# Altium PCB main.PcbDoc (part 2 of 3)
Units mm, origin at the board's own origin, x right, y up, seen from the top; angles counter-clockwise.
Board outline 60 x 99 mm, 4 copper layers (Top Layer, Ground Layer, Power Layer, Bottom Layer), stack 1.591 mm thick; 202 components, 164 nets, 893 pads, 275 vias.
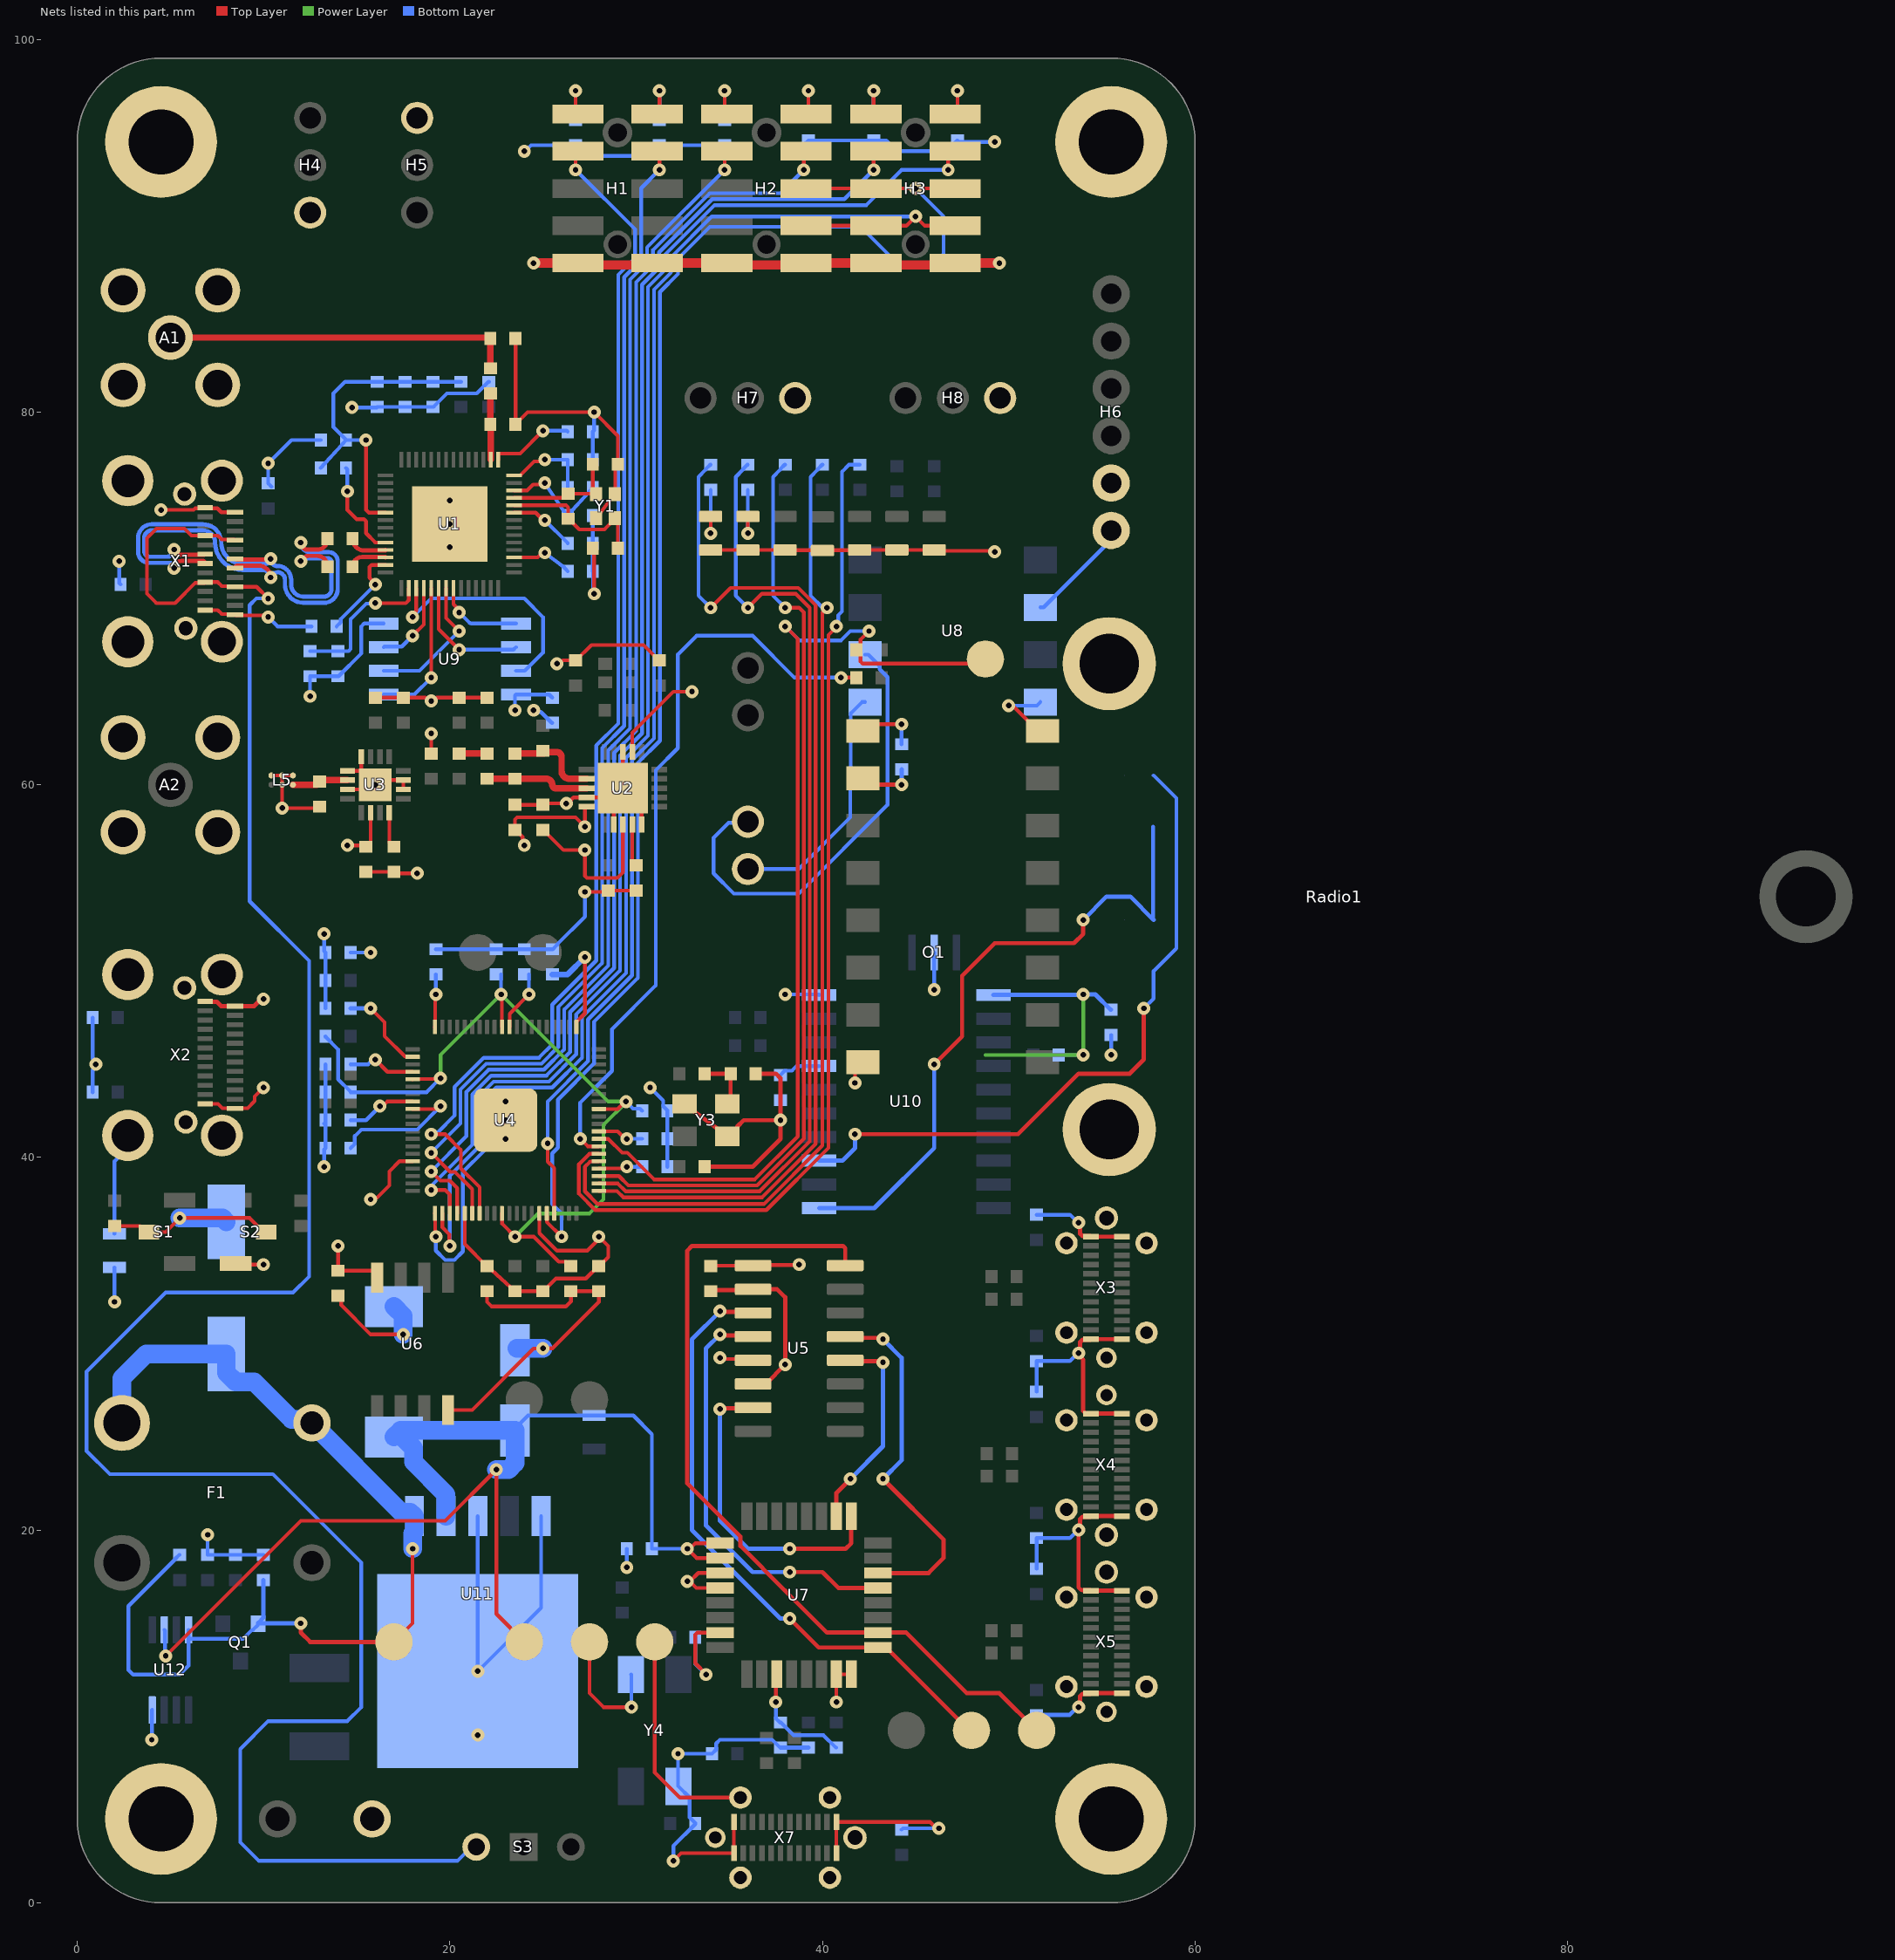
[diagram p4: the nets of this part, all layers, seen from the top]

## Part data
A1 A2: library part "[SMA] 90deg Jack", "SMA-J-P-H-RA-TH1", Supplier Part Number 1=SAM8856-ND, Supplier 1=DigiKey
C1 C2: library part "[Cap] SMD Nonpolarized", Capacitance=1.2pF, Size Package=0603, Supplier Part Number 1=4713-CHV0603N2501R2BCT-ND, Tolerance=1%, Voltage=6.3V, Supplier 1=DigiKey
C3 C4: library part "[Cap] SMD Nonpolarized", Capacitance=6pF, Size Package=0603, Supplier Part Number 1=311-1055-1-ND, Tolerance=1%, Voltage=6.3V, Supplier 1=DigiKey
C5 C6: library part "[Cap] SMD Nonpolarized", Capacitance=14pF, Size Package=0603, Supplier Part Number 1=311-3887-1-ND, Tolerance=1%, Voltage=6.3V, Supplier 1=DigiKey
C7: library part "[Cap] SMD Nonpolarized", Capacitance=4.7pF, Size Package=0603, Supplier Part Number 1=13-CC0603CPNPO9BN4R7CT-ND, Tolerance=5%, Voltage=6.3V, Supplier 1=DigiKey
C8: library part "[Cap] SMD Nonpolarized", Capacitance=2.2nF, Size Package=0603, Supplier Part Number 1=490-1459-1-ND, Tolerance=5%, Voltage=6.3V, Supplier 1=DigiKey
C9: library part "[Cap] SMD Nonpolarized", Capacitance=1.0pF, Size Package=0603, Supplier Part Number 1=311-1049-1-ND, Tolerance=5%, Voltage=6.3V, Supplier 1=DigiKey
C10: library part "[Cap] SMD Nonpolarized", Capacitance=1.5pF, Size Package=0603, Supplier Part Number 1=311-1737-1-ND, Tolerance=5%, Voltage=6.3V, Supplier 1=DigiKey
C11: library part "[Cap] SMD Nonpolarized", Capacitance=0.3pF, Size Package=0603, Supplier Part Number 1=712-QSCP251Q0R3A1GV001TCT-ND, Tolerance=5%, Voltage=6.3V, Supplier 1=DigiKey
C12: library part "[Cap] SMD Nonpolarized", Capacitance=1nF, Size Package=0603, Supplier Part Number 1=490-1451-6-ND, Tolerance=5%, Voltage=6.3V, Supplier 1=DigiKey
C13: library part "[Cap] SMD Nonpolarized", Capacitance=10nF, Size Package=0603, Supplier Part Number 1=399-C0603C103J5RACTUDKR-ND, Tolerance=5%, Voltage=6.3V, Supplier 1=DigiKey
C14: library part "[Cap] SMD Nonpolarized", Capacitance=1uF, Size Package=0603, Supplier Part Number 1=311-3485-1-ND, Tolerance=5%, Voltage=6.3V, Supplier 1=DigiKey
C15: library part "[Cap] SMD Nonpolarized", Capacitance=220pF, Size Package=0603, Supplier Part Number 1=399-C0603C221J5GAC7411CT-ND, Tolerance=5%, Voltage=6.3V, Supplier 1=DigiKey
C16: library part "[Cap] SMD Nonpolarized", Capacitance=33nF, Size Package=0603, Supplier Part Number 1=311-4015-1-ND, Tolerance=5%, Voltage=6.3V, Supplier 1=DigiKey
C17 C18: Capacitance=15pF, Size Package=0603, Supplier Part Number 1=490-16416-1-ND, Tolerance=1%, Voltage=6.3V, Supplier 1=DigiKey
C19 C20 C21 C22 C23 C24 C25 C26 C27 C28 C29 C35 C39 C40 C42 C43 C44 C45 C46 C48 C51 C52 C53 C55 C56 C57 C58 C59 C62 C63 C64 C66 C67: Capacitance=100nF, Size Package=0603, Supplier Part Number 1=311-1088-6-ND, Tolerance=5%, Voltage=6.3V, Supplier 1=DigiKey
C30 C31: library part "[Cap] SMD Nonpolarized", Capacitance=1.8pF, Size Package=0603, Supplier Part Number 1=478-600S1R8BT250XT4KCT-ND, Tolerance=10%, Voltage=6.3V, Supplier 1=DigiKey
C32 C34 C36 C38 C41: library part "[Cap] SMD Nonpolarized", Capacitance=1uF, Size Package=0603, Supplier Part Number 1=1276-6524-1-ND, Tolerance=10%, Voltage=6.3V, Supplier 1=DigiKey
C33: library part "[Cap] SMD Nonpolarized", Capacitance=10uF, Size Package=0603, Supplier Part Number 1=587-3258-1-ND, Tolerance=10%, Voltage=6.3V, Supplier 1=DigiKey
C37: library part "[Cap] SMD Nonpolarized", Capacitance=100pF, Size Package=0603, Supplier Part Number 1=490-1427-1-ND, Tolerance=10%, Voltage=6.3V, Supplier 1=DigiKey
C47 C49 C50 C54: Capacitance=4.7uF, Size Package=0603, Supplier Part Number 1=490-7203-1-ND, Tolerance=10%, Voltage=6.3V, Supplier 1=DigiKey
C60: library part "[Cap] SMD Polarized", Capacitance=680uF, Max Voltage=6.3V, Supplier Part Number 1=PCE3781CT-ND, Tolerance=20%, Diameter=8mm, Supplier 1=DigiKey
C61: library part "[Cap] SMD Polarized", Capacitance=220uF, Max Voltage=6.3V, Supplier Part Number 1=493-17593-1-ND, Tolerance=20%, Diameter=5mm, Supplier 1=DigiKey
C65 C68: library part "[Cap] SMD Nonpolarized", Capacitance=24pF, Size Package=0603, Supplier Part Number 1=490-GCM1885C2A240JA16DCT-ND, Tolerance=1%, Voltage=6.3V, Supplier 1=DigiKey
D1: library part "[LED] SMD", "Generic", Color=Green, Size Package=0805, Supplier Part Number 1=475-LGR971-KN-1CT-ND, Supplier 1=DigiKey
D2: library part "[LED] SMD", "Generic", Color=Yellow, Size Package=0805, Supplier Part Number 1=475-LYR976-PS-36-0-20-R18CT-ND, Supplier 1=DigiKey
D3: library part "[LED] SMD", "Generic", Color=Red, Size Package=0805, Supplier Part Number 1=475-LSR976-NR-1CT-ND, Supplier 1=DigiKey
D4 D7: library part "[LED] SMD", "Generic", Color=Blue, Size Package=0805, Supplier Part Number 1=732-4982-1-ND, Supplier 1=DigiKey
D5 D6: library part "[LED] SMD", "Generic", Color=Yellow, Size Package=0805, Supplier Part Number 1=3147-B1701UY--20D000214U1930CT-ND, Supplier 1=DigiKey
D8: library part "[Diode] SMD Schottky", "Generic", Size Package=DO-214AB, Supplier Part Number 1=B530C-FDICT-ND, Supplier 1=DigiKey
F1: library part "[Fuse] Blade Right-Angle", Supplier Part Number 1=36-3549-2-ND, Amperage=10A, Supplier 1=DigiKey
F2: "MF-MSMF050-2", Size Package=1812, Supplier Part Number 1=MF-MSMF050-2DKR-ND, Trip Current=500mA, Supplier 1=DigiKey
H1 H2 H3: Supplier Part Number 1=WM4227-ND, Supplier 1=DigiKey
H4 H5 H7 H8: library part "[Header] Shrouded 1x3 Male", "070543-0037 / Mates with 005057-9403", Supplier Part Number 1=WM4825-ND, Supplier 1=DigiKey
  H7 H8: Supplier 2=DigiKey, Supplier Part Number 2=WM2901-ND
H6: "0705430005 / Mates with 0050579406", Supplier Part Number 1=WM4804-ND, Supplier 1=DigiKey, Supplier 2=DigiKey, Supplier Part Number 2=WM2904-ND
H9 H10: library part "[Header] Shrouded 1x2 Male", "0705430036 / Mates with 0050579402", Supplier Part Number 1=WM4824-ND, Supplier 1=DigiKey, Supplier 2=DigiKey, Supplier Part Number 2=WM2900-ND
J1 J2 J3 J4: "Solderable jumper"
  J1 J3: NO/NC=NO
  J2 J4: NO/NC=NC
L1: library part "[Inductor] SMD Inductor", Inductance=2.7nH, Size Package=0603, Supplier Part Number 1=732-7447860027GCT-ND, Supplier 1=DigiKey
L2: library part "[Inductor] SMD Inductor", Inductance=2.7nH, Size Package=0603, Supplier Part Number 1=490-1103-1-ND, Supplier 1=DigiKey
L3: library part "[Inductor] SMD Inductor", Inductance=3.9nH, Size Package=0603, Supplier Part Number 1=490-1105-1-ND, Supplier 1=DigiKey
L4: library part "[Inductor] SMD Inductor", Inductance=8.2nH, Size Package=0603, Supplier Part Number 1=490-1109-1-ND, Supplier 1=DigiKey
L5: library part "[Inductor] 2.4GHz Low-Pass RF Filter", "MLPF-NRG-01D3", Supplier Part Number 1=497-MLPF-NRG-01D3CT-ND, Supplier 1=DigiKey
L6: library part "[Inductor] SMD Inductor", Inductance=2.0nH, Size Package=0603, Supplier Part Number 1=490-LQW18AS2N0J00DCT-ND, Supplier 1=DigiKey
L7: library part "[Inductor] SMD Inductor", Inductance=10uH, Size Package=0603, Supplier Part Number 1=445-6755-1-ND, Supplier 1=DigiKey
L8: library part "[Ferrite] SMD Ferrite Bead (2)", Supplier Part Number 1=732-1620-1-ND, Supplier 1=DigiKey
L9: library part "[Inductor] SMD Inductor", Inductance=33uH, Size Package=0805, Supplier Part Number 1=445-6399-1-ND, Supplier 1=DigiKey
Mount1 Mount2 Mount3 Mount4: library part "[Mount] M3 Mount Hole", "Place at least 4.5mm from board edge. Plated."
O1: Supplier Part Number 1=490-17947-1-ND, Supplier 1=DigiKey
Q1: library part "[FET] P-Channel MOSFET", Size Package=TO236AB, Supplier Part Number 1=1727-PMV48XPA2RCT-ND, Supplier 1=DigiKey
R1 R8 R49: "Generic", Resistance=1Meg, Size Package=0603, Supplier Part Number 1=311-1.00MHRDKR-ND, Tolerance=1%, Supplier 1=DigiKey
R2 R3 R10 R12 R17 R18 R19 R20 R21 R22 R23 R24 R37 R39: "Generic", Resistance=27, Size Package=0603, Supplier Part Number 1=749-1631-1-ND, Tolerance=1%, Supplier 1=DigiKey
R4 R5 R11 R13 R14 R25 R26 R27 R28 R29 R30 R31: "Generic", Resistance=1k, Size Package=0603, Supplier Part Number 1=RMCF0603FT1K00DKR-ND, Tolerance=5%, Supplier 1=DigiKey
R6 R7 R40 R46 R47: "Generic", Resistance=10k, Size Package=0603, Supplier Part Number 1=311-10.0KHRDKR-ND, Tolerance=5%, Supplier 1=DigiKey
R9: "Generic", Resistance=22k, Size Package=0603, Supplier Part Number 1=311-22.0HRDKR-ND, Tolerance=1%, Supplier 1=DigiKey
R15 R16: "Generic", Resistance=2k, Size Package=0603, Supplier Part Number 1=P2.0KBDCT-ND, Tolerance=5%, Supplier 1=DigiKey
R32 R34: "Generic", Resistance=10k, Size Package=0603, Supplier Part Number 1=311-10.0KHRCT-ND, Tolerance=5%, Supplier 1=DigiKey
R33 R35 R38 R41 R42 R43 R44 R45 R48 R50 R52 R53: "Generic", Resistance=56k, Size Package=0603, Supplier Part Number 1=A129709CT-ND, Tolerance=1%, Supplier 1=DigiKey
R36: "Generic", Resistance=33, Size Package=0603, Supplier Part Number 1=RR08Q33DCT-ND, Tolerance=1%, Supplier 1=DigiKey
R51: "Generic", Resistance=47k, Size Package=0603, Supplier Part Number 1=311-4.70KHRDKR-ND, Tolerance=5%, Supplier 1=DigiKey
Radio1: library part "[Device] RFDX900 Radio", "RFDX900 Long-Range RF Module", Supplier Part Number 1=609-71609-308LF-ND, Supplier 1=DigiKey
S1 S2: Supplier Part Number 1=SW1021CT-ND, Supplier 1=DigiKey
S3: library part "[Switch] SPDT Switch", Supplier Part Number 1=1948-1087-ND, Supplier 1=DigiKey
TP1 TP2 TP3 TP4 TP5 TP6 TP7 TP8 TP9 TP10 TP11 TP12 TP13: library part "[Probe] Touch Pad"
U1: library part "[MCU] ESP32-S2", Supplier Part Number 1=1965-ESP32-S2FN4R2CT-ND, Supplier 1=DigiKey
U2: library part "[IC] NRF Transceiver", "NRF24L01P-R", Supplier Part Number 1=4823-NRF24L01P-RCT-ND, Supplier 1=DigiKey
U3: library part "[IC] RF Front-End", Supplier Part Number 1=863-1828-1-ND, Supplier 1=DigiKey
U4: library part "[MCU] RP2350B", "QFN-80 Package", Supplier Part Number 1=2648-SC1510-A4CT-ND, Supplier 1=DigiKey
U5: Supplier Part Number 1=296-26909-1-ND, Supplier 1=DigiKey
U6 U9: library part "[Mem] 16Mb Flash Memory", "W25Q128JVSIQ TR", Supplier Part Number 1=256-W25Q128JVSIQTRCT-ND, Supplier 1=DigiKey
U7: library part "[IC] USB Hub 4port (2)", "TUSB2046BVFR", Supplier Part Number 1=296-27131-1-ND, Supplier 1=DigiKey
U8: Supplier Part Number 1=160-2040-1-ND, Supplier 1=DigiKey
U10: library part "[IC] USB-UART Bridge", "MCP2200T-I/SO", Supplier Part Number 1=MCP2200T-I/SOCT-ND, Supplier 1=DigiKey
U11: library part "[Reg] 3V3 Regulator (4)", "3A", Supplier Part Number 1=LM2596SX-3.3/NOPBCT-ND, Supplier 1=DigiKey
U12: library part "[IC] Dual Op-Amp", "LMV358IDGKR", Supplier Part Number 1=296-13455-1-ND, Supplier 1=DigiKey
X1 X2: library part "[Port] USB Type-C", Supplier Part Number 1=670-3104-1-ND, Supplier 1=DigiKey
X3 X4 X5 X7: library part "[Port] USB Type-C Vertical", Supplier Part Number 1=277-1332646CT-ND, Supplier 1=DigiKey
X6: library part "[Screw Terminal] 2pin", Supplier Part Number 1=102-6145-ND, Supplier 1=DigiKey
Y1: library part "[XTAL] SMD 40MHz", "CX2016DB40000D0FLJCC", Supplier Part Number 1=478-CX2016DB40000D0FLJCCDKR-ND, Supplier 1=DigiKey
Y2: library part "[XTAL] SMD 16MHz (2)", "ABM11-16.000MHZ-12-N1G-T", Supplier Part Number 1=535-14950-1-ND, Supplier 1=DigiKey
Y3: library part "[XTAL] SMD 12MHz", "815-ABM8-272-T3", Supplier Part Number 1=535-ABM8-272-T3CT-ND, Supplier 1=DigiKey
Y4: "ECS-060-18-20BM-JEN-TR", Supplier Part Number 1=XC2349CT-ND, Supplier 1=DigiKey

## Via types
v1: diameter 0.7, hole 0.3, Top Layer to Bottom Layer, 275 vias

## Nets (pads, with @x,y where several pads share a name; then routed paths per layer and width w, separated by ;. In a path a pad name is that pad's centre, name@x,y a point inside that pad or via, vN(x,y) a via of type N, cw(c..) or ccw(c..) an arc to the next point about the centre after c; other vN are vias at no path point)
+1V1: C20.2 C47.2 C54.2 C55.2 L7.1 U4.10 U4.32 U4.51 U4.65 | length 47.3
  Top Layer w0.2: U4.65@18,44.2 18.01,44.21 19.46,44.21 v1(19.5,44.25) ; v1(22.75,48.75) 22.79,48.71 22.79,47.01 U4.51@22.8,47 ; U4.10@22.8,37 22.81,36.99 22.81,36.44 v1(23.5,35.75) 24.5,35.75 25.85,34.4 26.275,34.4 C20.2@26.5,34.175 ; U4.32@28,42.6 29.009,42.6 29.409,43 v1@29.5,43
  Power Layer w0.2: v1(19.5,44.25) 19.5,45.5 v1(22.75,48.75) 28.5,43 29.5,43 28.25,41.75 28.25,37.75 27.495,36.995 24.745,36.995 v1(23.5,35.75)
  Bottom Layer w0.2: L7.1@13.325,46.5 13.325,46.475 14,45.8 14,44.2 14.675,43.525 C54.2@14.675,43.5 18.75,43.5 v1(19.5,44.25) ; v1(22.75,48.75) C47.2@22.75,49.825 ; v1(29.455,43) 29.831,42.623 30.202,42.623 C55.2@30.325,42.5
+3V3: C12.2 C13.2 C14.2 C19.2 C21.2 C23.1 C24.2 C25.2 C26.2 C27.2 C28.2 C29.2 C31.2 C32.2 C33.2 C34.2 C35.2 C37.2 C38.2 C39.2 C40.2 C41.2 C42.2 C43.2 C45.2 C46.2 C48.2 C49.1 C50.2 C52.2 C56.2 C57.2 C58.2 C59.2 C61.1 C62.2 C66.2 D8.1 H1.1 H1.2 H2.1 H2.2 H3.1 H3.2 L6.1 L9.2 R15.2 R16.2 R32.1 R34.1 R36.2 R51.1 TP8.1 U1.1 U1.20 U1.27 U1.30 U1.45 U1.51 U1.54 U2.7 U2.15 U2.18 U3.14 U4.5 U4.15 U4.24 U4.29 U4.41 U4.50 U4.60 U4.64 U4.68 U4.69 U4.76 U6.8 U7.3 U7.25 U7.26 U9.8 U11.2 U12.6 | length 226.5
  Top Layer w0.2: v1(4.75,13.25) 12,20.5 19.75,20.5 v1(22.5,23.25) 22.5,15.5 TP8.1@24,14 ; v1(14,35.25) C23.1@14,33.925 15.87,33.925 16.095,33.7 U6.8@16.095,33.55 ; v1(14.5,56.75) 15.425,56.75 C14.2@15.5,56.675 ; v1(15.5,78.5) 15.5,74.75 15.65,74.6 U1.20@16.55,74.6 ; C14.2@15.525,56.675 15.75,56.9 U3.14@15.75,58.5 ; v1(15.75,37.75) 15.846,37.846 16.096,37.846 16.75,38.5 16.75,39.25 17.3,39.8 U4.76@18,39.8 ; v1(16,45.25) 16.65,44.6 U4.64@18,44.6 ; v1(16,69.75) 17.639,69.75 17.8,69.911 U1.30@17.8,70.55 ; v1(16,70.75) 16,70.805 15.694,71.111 15.694,71.689 15.805,71.8 U1.27@16.55,71.8 ; v1(16.25,42.75) 16.385,42.75 16.635,43 U4.68@18,43 ; U4.69@18,42.6 19.215,42.6 19.365,42.75 v1(19.5,42.75) ; U4.60@19.2,47 19.21,47.01 19.21,48.71 v1(19.25,48.75) ; U4.5@20.8,37 20.8,35.35 21.975,34.175 C19.2@22,34.175 22.25,33.95 23.25,33.05 R15.2@23.5,32.825 R16.2@25,32.825 25.025,32.825 25.7,33.5 27.3,33.5 27.975,34.175 C21.2@28,34.175 ; U1.1@22.6,77.45 22.6,77.775 23.775,77.775 v1(25,79) ; U4.50@23.2,47 23.21,47.01 23.21,47.71 v1(24.25,48.75) ; U1.45@23.45,72.2 24.715,72.2 24.965,72.45 v1(25.1,72.45) ; U1.51@23.45,74.6 24.609,74.6 25.009,74.2 v1(25.1,74.2) ; U1.54@23.45,75.8 24.155,75.8 24.47,76.115 25.015,76.115 v1(25.1,76.2) ; v1(24,56.75) 23.904,56.846 23.904,57.196 23.525,57.575 C12.2@23.5,57.575 23.5,58.139 23.611,58.25 26.75,58.25 v1(27.25,57.75) 27.25,58.768 27.3,58.818 U2.15@27.345,58.818 ; U4.15@24.8,37 24.81,36.99 24.81,35.94 25.75,35 27.385,35 28,35.615 v1(28,35.75) 28.5,35.25 28.5,34.65 C21.2@28.025,34.175 ; C13.2@25,57.575 25.025,57.575 26.1,56.5 v1(27.25,56.5) 27.25,55.111 27.361,55 28.989,55 29.295,55.306 U2.18@29.295,57.868 ; v1(26.75,97.25) 26.75,96.125 H1.1@26.875,96 ; U4.41@26.8,47 26.8,47.28 27.25,47.73 v1(27.25,50.75) ; U4.24@28,39.4 28.01,39.41 29.41,39.41 v1(29.5,39.5) ; U4.29@28,41.4 29.009,41.4 29.409,41 v1(29.5,41) ; U2.7@29.795,61.768 29.795,62.795 32,65 v1(33,65) ; H1.2@31.125,96 31.25,96.125 v1(31.25,97.25) ; U7.26@34.512,18.5 33.25,18.5 v1(32.75,19) 32.885,19 33.185,19.3 U7.25@34.512,19.3 ; v1(34.75,97.25) 34.75,96.125 H2.1@34.875,96 ; v1(37.5,10.775) 37.5,12.212 U7.3@37.55,12.262 ; H2.2@39.125,96 39.25,96.125 v1(39.25,97.25) ; v1(42.75,97.25) 42.75,96.125 H3.1@42.875,96 ; H3.2@47.125,96 47.25,96.125 v1(47.25,97.25)
  Bottom Layer w0.2: U12.6@4.675,14.65 4.713,14.613 4.713,13.287 v1(4.75,13.25) ; C42.2@12.5,67.175 14.564,67.175 14.675,67.286 14.675,68.888 15.513,69.726 15.976,69.726 v1(16,69.75) ; R32.1@13.075,77 13.3,77.25 14.2,78.25 C35.2@14.425,78.5 ; v1(13.25,52) 13.25,51.075 C49.1@13.325,51 R36.2@13.325,49.5 C50.2@13.325,48 ; C40.2@13.925,68.5 14.15,68.725 14.15,68.9 v1(16,70.75) ; C58.2@14.675,40.5 14.9,40.725 14.9,41.15 15.25,41.5 18.25,41.5 v1(19.5,42.75) ; C56.2@14.675,42 15.5,42 v1(16.25,42.75) ; C52.2@14.675,45 15.615,45 15.865,45.25 v1(16,45.25) ; v1(15.5,78.5) C35.2@14.425,78.5 ; v1(19.25,48.75) C48.2@19.25,49.825 ; L6.1@20.6,81.625 C31.2@19.1,81.625 C32.2@17.6,81.625 C33.2@16.1,81.625 14.375,81.625 13.75,81 13.75,79.2 14.425,78.525 C35.2@14.425,78.5 ; C61.1@23.5,25.35 23.5,25.45 24.2,26.15 L9.2@27.75,26.15 29.85,26.15 30.85,25.15 C62.2@30.85,19 v1(32.75,19) ; v1(23.5,64) 23.5,64.794 U9.8@23.55,64.845 25.33,64.845 C43.2@25.5,64.675 ; v1(24.25,48.75) C46.2@24.25,49.825 ; v1(25,79) 26.275,79 C34.2@26.325,78.95 ; v1(25.1,72.45) 26.1,71.7 C39.2@26.325,71.45 ; v1(25.1,74.2) 26.325,72.975 C38.2@26.325,72.95 ; v1(25.1,76.2) 26.1,74.7 C37.2@26.325,74.425 ; C37.2@26.325,74.45 26.55,74.7 27.45,75.7 R34.1@27.675,75.95 ; C29.2@26.75,95.675 v1(26.75,97.25) ; v1(29.5,39.5) C59.2@30.325,39.5 ; v1(29.5,41) C57.2@30.325,41 ; C28.2@31.25,95.675 v1(31.25,97.25) ; C27.2@34.75,95.675 v1(34.75,97.25) ; v1(37.5,10.775) 37.5,9.9 37.725,9.675 C66.2@37.75,9.675 ; C66.2@37.775,9.675 38.45,9 40.05,9 40.725,8.325 R51.1@40.75,8.325 ; C26.2@39.25,95.925 v1(39.25,97.25) ; C25.2@42.75,95.925 v1(42.75,97.25) ; C24.2@47.25,95.925 v1(47.25,97.25)
  Bottom Layer w0.3: C45.2@25.5,49.825 26.325,49.825 v1(27.25,50.75)
  Bottom Layer w1: D8.1@17,25 17.35,25.35 C61.1@23.5,25.35 23.5,23.596 23.154,23.25 v1(22.5,23.25) ; D8.1@17.45,25 18.05,24.4 18.05,23.66 19.79,21.92 19.79,20.76 U11.2@19.8,20.75
+5V: C22.2 C44.2 C51.2 C60.1 C63.2 F1.1 Q1.2 R40.2 R47.2 Radio1.4 TP6.1 U5.2 U5.6 U10.1 U11.1 U12.8 | length 86.7
  Top Layer w0.2: TP6.1@17,14 TP6.1@17,14 18,15.002 v1(18,19)
  Top Layer w0.23: v1(12,15) 12.001,14.999 12.001,14.499 12.5,14 TP6.1@17,14 ; C22.2@34,32.825 34.05,32.875 36.225,32.875 U5.2@36.275,32.925 37.575,32.925 38,32.5 v1(38,28.885) 36.96,27.845 U5.6@36.275,27.845 ; Radio1.4@42.175,60.35 42.525,60 v1(44.25,60)
  Power Layer w0.2: 48.75,45.5 v1(54,45.5) v1(54,48.75)
  Bottom Layer w0.2: R47.2@5.5,18.675 5.475,18.675 5.25,18.45 5.25,18.425 2.75,15.925 2.75,12.5 3,12.25 5.5,12.25 5.975,12.725 U12.8@5.975,14.65 ; U12.8@5.975,14.165 8.908,14.165 9.363,14.62 9.413,14.62 9.713,14.92 Q1.2@9.713,14.97 ; R40.2@52.675,45.5 v1(54,45.5)
  Bottom Layer w0.23: Q1.2@9.713,14.97 9.743,15 v1(12,15) ; Q1.2@9.713,15.02 10,15.307 C63.2@10,17.325 ; v1(44.25,60) C44.2@44.25,60.825 ; U10.1@49.175,48.715 49.193,48.733 53.983,48.733 v1(54,48.75) 54.65,48.75 55.475,47.925 C51.2@55.5,47.925
  Bottom Layer w1: F1.1@2.4,25.75 2.4,28.15 3.7,29.45 C60.1@8,29.45 8,28.45 8.5,27.95 9.5,27.95 11.509,25.941 12.409,25.941 F1.1@12.6,25.75 17.38,20.97 17.88,20.97 U11.1@18,20.85 ; v1(18,19) 18,19.824 18.09,19.914 18.09,20.74 U11.1@18.1,20.75
\Relay_Trip: R4.1 TP1.1 U4.28 | length 54.1
  Top Layer w0.2: U4.28@28,41 28.01,40.99 28.51,40.99 29.25,40.25 29.528,40.25 30.958,38.82 36.367,38.82 38.68,41.133 38.68,67.82 v1(38,68.5) ; v1(42.5,68.25) 42.05,67.8 42.05,67.475 R4.1@41.825,67.25 42.05,67.025 42.05,66.611 42.161,66.5 48.5,66.5 TP1.1@48.75,66.75
  Bottom Layer w0.2: v1(38,68.5) 38.75,67.75 41,67.75 41.5,68.25 v1(42.5,68.25)
\USB1_EN: TP12.1 U5.3 U7.9 | length 33.6
  Top Layer w0.23: v1(34.5,31.75) 34.548,31.702 36.228,31.702 U5.3@36.275,31.655 ; v1(38.25,15.25) 39.8,13.7 U7.9@42.988,13.7 43.426,13.7 47.876,9.25 TP12.1@48,9.25
  Bottom Layer w0.23: v1(34.5,31.75) 33,30.25 33,20 37.749,15.251 v1(38.25,15.25) v1(38.25,15.25)
\USB1_OC: TP13.1 U5.16 U7.10 | length 46.6
  Top Layer w0.23: U5.16@41.225,34.195 41.225,35.13 41.105,35.25 33,35.25 32.75,35 32.75,22.5 35.6,19.65 35.6,19.15 38,16.75 40.25,14.5 U7.10@42.988,14.5 44.5,14.5 47.75,11.25 49.5,11.25 TP13.1@51.5,9.25
\USB2_EN: U5.4 U7.13 | length 23
  Top Layer w0.23: v1(34.5,30.5) 34.558,30.442 36.218,30.442 U5.4@36.275,30.385 ; v1(38.25,17.75) 40,17.75 40.85,16.9 U7.13@42.988,16.9
  Bottom Layer w0.23: v1(34.5,30.5) 33.75,29.75 33.75,20.25 36.25,17.75 v1(38.25,17.75)
\USB2_OC: U5.13 U7.14 | length 19.8
  Top Layer w0.23: U5.13@41.225,30.385 41.292,30.318 43.182,30.318 v1(43.25,30.25) ; U7.14@42.988,17.7 45.7,17.7 46.5,18.5 46.5,19.5 v1(43.25,22.75)
  Bottom Layer w0.23: v1(43.25,22.75) 44.25,23.75 44.25,29.25 v1(43.25,30.25)
\USB3_EN: U5.7 U7.17 | length 17.1
  Top Layer w0.23: v1(34.5,26.5) 34.538,26.538 36.238,26.538 U5.7@36.275,26.575 ; v1(38.25,19) 41.25,19 41.55,19.3 U7.17@41.55,20.738 U7.17@41.525,20.713
  Bottom Layer w0.23: v1(34.5,26.5) 34.5,20.5 36,19 v1(38.25,19)
\USB3_OC: U5.12 U7.18 | length 11.4
  Top Layer w0.23: U7.18@40.75,20.738 40.75,22 v1(41.5,22.75) ; U5.12@41.225,29.115 41.282,29.058 43.192,29.058 v1(43.25,29)
  Bottom Layer w0.23: v1(41.5,22.75) 43.25,24.5 v1(43.25,29)
ANT1: L2.1 L4.1 U2.12 | length 5
  Top Layer w0.35: L4.1@23.5,61.675 25,61.675 ccw(c25,61.75) 25.075,61.75 25.75,61.75 cw(c25.75,61.5) 26,61.5 26,60.75 ccw(c26.432,60.75) 26.432,60.318 U2.12@27.345,60.318
ANT2: L3.1 L4.2 U2.13 | length 5.6
  Top Layer w0.35: L3.1@22,60.325 L4.2@23.5,60.325 25.175,60.325 cw(c25.175,60) 25.5,60 ccw(c25.682,60) 25.682,59.818 U2.13@27.345,59.818
Bridge_CTS: J1.2 J4.2 U10.13 | length 36.6
  Top Layer w0.23: v1(41.75,41.25) 50.5,41.25 53.75,44.5 56.5,44.5 57.25,45.25 v1(57.25,48)
  Bottom Layer w0.2: v1(57.25,48) 57.78,48.53 J4.2@57.78,50 59,51.22 59,59.28 J1.2@57.78,60.5
  Bottom Layer w0.23: U10.13@39.825,39.825 41.075,39.825 41.75,40.5 v1(41.75,41.25)
Bridge_RTS: J2.2 J3.2 U10.11 | length 35.4
  Top Layer w0.23: v1(46,45) 47.5,46.5 47.5,49.75 49.25,51.5 53.5,51.5 54,52 v1(54,52.75)
  Bottom Layer w0.2: J2.2@57.75,57.75 57.75,52.78 J3.2@57.78,52.75
  Bottom Layer w0.23: U10.11@39.825,37.285 42.785,37.285 46,40.5 v1(46,45) ; v1(54,52.75) 55.25,54 56.53,54 J3.2@57.78,52.75
Buzzer_1: H10.1 U8.6 | length 24.5
  Bottom Layer w0.2: H10.1@36,58.02 35.943,57.963 34.963,57.963 34.155,57.155 34.155,55.25 35.25,54.155 38.729,54.155 43.5,58.927 43.5,65.775 43.075,66.2 43.075,66.37 42.465,66.98 U8.6@42.295,66.98
Buzzer_2: H10.2 U8.5 | length 13.3
  Bottom Layer w0.2: H10.2@36,55.48 38.73,55.48 41.5,58.25 41.5,60.504 41.515,60.52 41.515,63.83 42.125,64.44 U8.5@42.295,64.44
Buzzer_Control: R5.2 U4.27 | length 40.3
  Top Layer w0.2: v1(27,41) 27.4,40.6 U4.27@28,40.6 U4.27@27.99,40.59 ; v1(41,65.75) R5.2@41.825,65.75
  Bottom Layer w0.2: v1(27,41) 27,42.94 28.7,44.64 28.7,46.877 31.06,49.237 31.06,60.785 32.24,61.965 32.24,66.99 33.25,68 36.25,68 38.5,65.75 v1(41,65.75)
DAC2: R32.2 U1.24 | length 5.4
  Top Layer w0.2: v1(14.5,75.75) 14.5,74.75 15,74.25 15.389,74.25 15.5,74.139 15.5,73.5 16,73 U1.24@16.55,73
  Bottom Layer w0.2: R32.2@14.425,77 14.5,76.925 v1(14.5,75.75)
Earth: L8.1 Mount1.1 Mount2.1 Mount3.1 Mount4.1 Radio1.X@55.395,41.5 Radio1.X@55.395,66.5 TP10.1 X1.MH X2.MH X3.MH X4.MH X5.MH X7.MH | length 17.7
  Top Layer w0.2: TP10.1@31,14 31,7 32.35,5.65 X7.MH@35.6,5.65
  Bottom Layer w0.2: L8.1@2,35.9 2,39.794 2.715,40.509 X2.MH@2.715,41.18
ESP32-SPI-CLK: U1.34 U9.6 | length 6.9
  Top Layer w0.2: U1.34@19.4,70.55 19.4,68.35 v1(20.5,67.25)
  Bottom Layer w0.2: v1(20.5,67.25) 23.416,67.25 U9.6@23.55,67.385
ESP32-SPI-CS0: U1.33 U9.1 | length 7.7
  Top Layer w0.2: v1(19,65.75) U1.33@19,70.55
  Bottom Layer w0.2: U9.1@16.45,64.845 18.095,64.845 v1(19,65.75)
ESP32-SPI-D: U1.36 U9.5 | length 4.7
  Top Layer w0.2: U1.36@20.2,70.55 20.2,69.685 20.5,69.385 v1(20.5,69.25)
  Bottom Layer w0.2: v1(20.5,69.25) 21.039,68.711 ccw(c21.174,68.845) 21.174,68.655 U9.5@23.55,68.655
ESP32-SPI-HD: U1.31 U9.7 | length 13.2
  Top Layer w0.2: v1(18,69) 18,69.135 18.2,69.335 U1.31@18.2,70.55
  Bottom Layer w0.2: v1(18,69) 19,70 24,70 25,69 25,67.089 24.025,66.115 U9.7@23.55,66.115
ESP32-SPI-Q: U1.35 U9.2 | length 7.5
  Top Layer w0.2: U1.35@19.8,70.55 19.8,68.95 v1(20.5,68.25)
  Bottom Layer w0.2: U9.2@16.45,66.115 18.365,66.115 v1(20.5,68.25)
ESP32-SPI-WP: U1.32 U9.3 | length 4.6
  Top Layer w0.2: v1(18,68) 18.6,68.6 U1.32@18.6,70.55
  Bottom Layer w0.2: U9.3@16.45,67.385 16.485,67.419 17.419,67.419 v1(18,68)
ESP32-USB-5V-VIN: S3.3 X1.A4 X1.A9 X1.B4 X1.B9 | length 123.4
  Top Layer w0.2: X1.A4@8.465,73.125 8.43,73.16 7.76,73.16 7.545,73.375 X1.B9@6.865,73.375 6.125,73.375 5.75,73.75 4.25,73.75 3.737,73.237 3.737,70.263 4.25,69.75 5.25,69.75 6.34,70.84 6.83,70.84 X1.B4@6.865,70.875 7.545,70.875 7.76,70.66 8.43,70.66 X1.A9@8.465,70.625 9.625,70.625 v1(10.25,70)
  Bottom Layer w0.2: v1(10.25,70) 9.611,70 9.25,69.639 9.25,53.75 12.45,50.55 12.45,33.613 11.587,32.75 4.75,32.75 0.5,28.5 0.5,24.25 1.75,23 10.5,23 15.25,18.25 15.25,10.5 14.5,9.75 10.25,9.75 8.75,8.25 8.75,3.25 9.75,2.25 20.409,2.25 21.159,3 S3.3@21.42,3
ESP-PU: C36.2 R34.2 U1.56 | length 4.7
  Top Layer w0.2: U1.56@23.45,76.6 23.775,76.6 24.529,77.354 25.004,77.354 v1(25.1,77.45)
  Bottom Layer w0.2: v1(25.1,77.45) C36.2@26.325,77.45 R34.2@26.325,75.95
ESP-XTAL1: C3.2 R1.2 U1.53 Y1.1 | length 6.2
  Top Layer w0.2: U1.53@23.45,75.4 26.125,75.4 R1.2@26.35,75.625 27.825,75.625 Y1.1@27.85,75.6 27.675,75.775 C3.2@27.675,77.2
ESP-XTAL2: C4.2 R1.1 U1.52 Y1.3 | length 8.1
  Top Layer w0.2: U1.52@23.45,75 26.239,75 26.35,74.889 R1.1@26.35,74.275 26.375,74.275 26.95,73.7 28.3,73.7 28.85,74.25 29.025,74.075 C4.2@29.025,72.7
ESP_D_N: R2.1 X1.A7 X1.B7 | length 26.6
  Top Layer w0.23: v1(5.2,72.625) ccw(c5.485,72.625) 5.485,72.34 6.73,72.34 6.743,72.34 ccw(c6.743,72.571) 6.825,72.355 X1.B7@6.865,72.375 ; X1.A7@8.465,71.625 cw(c8.6,71.625) 8.6,71.76 9.745,71.76 cw(c9.745,71.125) 9.958,71.723 cw(c9.88,71.506) 10.024,71.686 ccw(c10.38,72.125) 10.134,71.616 cw(c10.033,71.409) 10.196,71.572 cw(c9.745,71.125) v1(10.38,71.125) ; v1(12,73) ccw(c12.385,73) 12.385,72.615 12.875,72.615 ccw(c12.875,73.165) 13.425,73.165 R2.1@13.425,73.2
  Bottom Layer w0.23: v1(5.2,72.625) cw(c4.815,72.625) 4.815,72.24 3.86,72.24 cw(c3.86,72.471) 3.646,72.385 3.6,72.5 3.6,73.25 cw(c4,73.25) 4,73.65 6.75,73.65 cw(c6.75,73) 7.4,73 ccw(c8.871,73) 8.871,71.529 9.976,71.529 cw(c9.976,71.125) v1(10.38,71.125) 10.38,71.14 cw(c10.61,71.14) 10.557,71.364 10.75,71.41 cw(c10.75,71.01) 11.15,71.01 11.15,70.75 ccw(c12.13,70.75) 12.13,69.77 13.25,69.77 ccw(c13.25,70.5) 13.98,70.5 13.98,72 ccw(c13.5,72) 13.5,72.48 12.52,72.48 cw(c12.52,73) v1(12,73)
ESP_D_P: R3.1 X1.A6 X1.B6 | length 25.9
  Top Layer w0.23: v1(5.2,71.625) cw(c5.585,71.625) 5.585,72.01 6.73,72.01 cw(c6.73,71.875) X1.B6@6.865,71.875 ; X1.A6@8.465,72.125 8.518,72.105 ccw(c8.6,72.321) 8.6,72.09 10.345,72.09 ccw(c10.345,72.125) v1(10.38,72.125) ; v1(12,72) 12.224,72.219 cw(c12.385,72.054) 12.385,72.285 12.875,72.285 cw(c12.875,71.735) 13.425,71.735 R3.1@13.425,71.7
  Bottom Layer w0.23: 4.815,71.91 3.86,71.91 cw(c3.86,72.5) 3.27,72.5 3.27,73.25 cw(c4,73.25) 4,73.98 6.75,73.98 cw(c6.75,73) 7.73,73 ccw(c8.871,73) 8.871,71.86 10.115,71.86 ccw(c10.115,72.125) v1(10.38,72.125) 10.38,72.11 ccw(c10.75,72.11) 10.75,71.74 cw(c10.75,71.01) 11.48,71.01 11.48,70.75 ccw(c12.13,70.75) 12.13,70.1 13.25,70.1 ccw(c13.25,70.5) 13.65,70.5 13.65,71.934 ccw(c13.42,71.934) 13.501,72.15 12.15,72.15 ccw(c12.15,72) v1(12,72) ; 4.815,71.91 4.96,71.91 cw(c4.96,71.679) 5.175,71.761 cw(c4.815,71.625) v1(5.2,71.625)
ESP_DX_N: R2.2 U1.25 | length 2.1
  Top Layer w0.23: R2.2@14.775,73.2 ccw(c15.396,73.2) 15.396,72.579 16.529,72.579 ccw(c16.529,72.6) U1.25@16.55,72.6
ESP_DX_P: R3.2 U1.26 | length 2.1
  Top Layer w0.23: R3.2@14.775,71.7 cw(c15.296,71.7) 15.296,72.221 16.529,72.221 cw(c16.529,72.2) U1.26@16.55,72.2
GND: A1.2 A1.3 A1.4 A1.5 A2.2 A2.3 A2.4 A2.5 C1.1 C2.1 C3.1 C4.1 C5.2 C6.2 C7.1 C8.1 C9.2 C11.1 C12.1 C13.1 C14.1 C15.1 C16.1 C17.1 C18.1 C19.1 C20.1 C21.1 C22.1 C23.2 C24.1 C25.1 C26.1 C27.1 C28.1 C29.1 C30.1 C31.1 C32.1 C33.1 C34.1 C35.1 C36.1 C37.1 C38.1 C39.1 C40.1 C41.1 C42.1 C43.1 C44.1 C45.1 C46.1 C47.1 C48.1 C49.2 C50.1 C51.1 C52.1 C53.1 C54.1 C55.1 C56.1 C57.1 C58.1 C59.1 C60.2 C61.2 C62.1 C63.1 C64.1 C65.2 C66.1 C67.1 C68.2 D1.2 D2.2 D3.2 D4.2 D5.2 D6.2 D7.2 D8.2 H1.9 H1.10 H2.9 H2.10 H3.9 H3.10 H4.1 H5.1 H6.5 H6.6 H7.3 H8.3 L5.2 L5.4 L5.5 L5.6 L8.2 O1.2 R6.1 R7.1 R9.1 R13.2 R33.1 R35.2 R38.1 R41.2 R42.2 R43.1 R44.1 R45.2 R46.1 R48.2 R50.1 R52.1 R53.2 Radio1.1 Radio1.2 Radio1.16 S1.GND S2.2 S2.GND TP9.1 U1.57 U2.8 U2.14 U2.17 U2.20 U2.21 U3.2 U3.3 U3.8 U3.9 U3.11 U3.17 U4.62 U4.Pad U5.1 U5.5 U6.4 U7.7 U7.8 U7.27 U7.28 U7.31 U8.2 U8.4 U9.4 U10.20 U11.3 U11.5 U12.4 X1.A1 X1.A12 X1.B1 X1.B12 X2.A1 X2.A12 X2.B1 X2.B12 X3.A1 X3.A12 X3.B1 X3.B12 X4.A1 X4.A12 X4.B1 X4.B12 X5.A1 X5.A12 X5.B1 X5.B12 X6.2 X7.A1 X7.A12 X7.B1 X7.B12 Y1.2 Y1.4 Y3.2 Y3.4 Y4.2 Y4.4 | length 391.5
  Top Layer w0.2: R13.2@2,36.325 3.375,36.325 3.7,36 S1.GND@3.85,36 4.75,36 v1(5.5,36.75) 9.25,36.75 10,36 S2.GND@10.15,36 ; v1(4.5,74.75) 6.25,74.75 6.34,74.84 6.83,74.84 X1.B12@6.865,74.875 6.9,74.84 7.52,74.84 7.735,74.625 X1.A1@8.465,74.625 ; X2.B1@6.865,42.875 7.56,42.875 7.79,42.645 8.445,42.645 X2.A12@8.465,42.625 8.485,42.645 9.145,42.645 9.525,43.025 9.525,43.275 v1(10,43.75) ; X1.B1@6.865,69.375 7.545,69.375 7.76,69.16 8.43,69.16 X1.A12@8.465,69.125 8.5,69.09 10.16,69.09 v1(10.25,69) ; S2.2@8.5,34.3 8.55,34.25 v1(10,34.25) ; L5.6@10.423,60.5 L5.5@11,60.5 ; L5.4@11.577,60.5 L5.5@11,60.5 ; C11.1@12.9,58.7 12.95,58.75 v1(11,58.75) L5.2@11,60 L5.5@11,60.5 ; C23.2@14,32.575 14.169,32.406 14.169,32.081 15.75,30.5 v1(17.5,30.5) ; U3.11@14.5,59.75 15.75,59.75 v1(16,60) ; U3.9@14.5,60.75 U3.17@15.25,60.75 ; U3.8@15.25,61.5 U3.17@15.25,60.75 ; C14.1@15.5,55.325 C15.1@17,55.325 17.075,55.25 v1(18.25,55.25) ; v1(15.75,48) 16.5,47.25 16.5,46.512 17.607,45.405 17.995,45.405 U4.62@18,45.4 ; R6.1@16,64.675 R7.1@17.5,64.675 18.69,64.675 18.865,64.5 v1(19,64.5) 19.135,64.5 19.31,64.675 C7.1@20.5,64.675 C8.1@22,64.675 ; U3.2@17.5,59.75 U3.3@17.5,60.25 16.25,60.25 v1(16,60) ; C9.2@19,61.675 v1(19,62.75) ; U6.4@19.905,26.45 21.2,26.45 24.495,29.745 v1@24.995,29.745 ; C19.1@22,32.825 22,32.25 22.25,32 26.225,32 26.5,32.275 C20.1@26.5,32.825 ; C12.1@23.5,58.925 C13.1@25,58.925 25.075,59 v1(26.25,59) 26.322,59 26.64,59.318 U2.14@27.345,59.318 28.795,59.318 U2.17@28.795,57.868 ; C2.1@23.525,79.35 C1.1@23.525,83.95 ; C2.1@23.525,79.375 23.75,79.6 23.775,79.6 24.175,80 v1(27.75,80) 29.025,78.725 C3.1@29.025,77.2 28.88,76.95 28.88,75.875 Y1.4@28.85,75.6 28.625,75.325 28.075,74.575 Y1.2@27.85,74.3 ; v1(25,29.75) 25.005,29.755 25.505,29.755 28,32.25 C21.1@28,32.825 ; v1(25.75,66.5) 25.885,66.5 26.06,66.675 C5.2@26.75,66.675 26.775,66.675 27.6,67.5 30.4,67.5 31.225,66.675 C6.2@31.25,66.675 ; v1(27.25,54.25) 28.425,54.25 R9.1@28.5,54.325 C16.1@30,54.325 ; TP9.1@27.5,14 27.5,11.25 28.25,10.5 v1(29.75,10.5) ; C4.1@27.675,72.7 27.75,72.625 v1(27.75,70.25) ; U2.8@29.295,61.768 U2.21@29.295,59.818 30.295,58.818 U2.20@30.295,57.868 ; v1(32,2.25) 32.415,2.665 X7.B12@35.25,2.665 X7.A1@35.25,4.335 ; v1(32.75,17.25) v1@32.885,17.25 ; v1(33.75,12.25) 33.75,12.286 33.175,12.861 33.175,14.389 33.286,14.5 U7.31@34.512,14.5 ; C22.1@34,34.175 34.02,34.195 U5.1@36.275,34.195 36.303,34.222 38.723,34.222 v1(38.75,34.25) ; D1.2@34,72.6 D2.2@36,72.6 D3.2@38,72.6 38.013,72.587 39.987,72.587 D7.2@40.001,72.574 40.014,72.587 41.987,72.587 D4.2@42,72.6 D5.2@44,72.6 D6.2@46,72.6 46.05,72.55 49.2,72.55 v1(49.25,72.5) ; v1(34.5,29.25) 34.568,29.182 36.208,29.182 U5.5@36.275,29.115 ; U7.28@34.512,16.9 33.235,16.9 v1@32.885,17.25 ; U7.27@34.512,17.7 33.335,17.7 v1@32.885,17.25 ; X7.B1@40.75,2.665 X7.A12@40.75,4.335 45.78,4.335 46.115,4 v1(46.25,4) ; v1(40.75,10.775) U7.7@40.75,12.262 U7.8@41.55,12.262 ; v1(41.75,44) 41.75,44.685 Radio1.16@42.175,45.11 ; Radio1.2@42.175,62.89 42.535,63.25 v1(44.25,63.25) ; v1(50,64.25) 50.096,64.154 50.306,64.154 51.57,62.89 51.93,62.89 cw(c51.79,62.89) Radio1.1@51.79,62.75 ; v1(53.75,20) 53.75,16.924 53.89,16.784 ; U3.17@15.25,60.75 v1(16,60)
  Top Layer w0.23: X2.B12@6.865,48.375 6.885,48.355 7.49,48.355 7.72,48.125 X2.A1@8.465,48.125 9.498,48.125 9.873,48.5 v1(10,48.5) ; C20.1@26.5,32.825 C21.1@28,32.825 ; Y3.4@32.6,42.875 33.134,42.466 34.365,41.535 34.821,41.186 Y3.2@34.9,41.125 35.025,41.125 35.434,41.535 35.434,41.66 35.774,42 v1(37.75,42) ; C18.1@33.675,39.5 36.25,39.5 37.75,41 v1(37.75,42) ; C17.1@36.425,44.5 37.5,44.5 37.75,44.25 v1(37.75,42) ; v1(53.75,10.5) 53.84,10.589 53.84,11.095 53.96,11.215 54.38,11.215 X5.A1@54.415,11.25 X5.B12@56.085,11.25 ; v1(53.75,20) 53.84,20.09 53.84,20.595 53.96,20.715 54.38,20.715 X4.B1@54.415,20.75 X4.A12@56.085,20.75 ; v1(53.75,36.5) 53.84,36.41 53.84,35.905 53.96,35.785 54.38,35.785 X3.A12@54.415,35.75 X3.B1@56.085,35.75 ; 53.96,16.784 54.38,16.784 X5.A12@54.415,16.75 X5.B1@56.085,16.75 ; X4.A1@56.085,26.25 54.14,26.25 54,26.39 54,29.145 53.75,29.395 v1(53.75,29.5) 53.84,29.59 53.84,30.095 53.96,30.215 54.38,30.215 X3.A1@54.415,30.25 X3.B12@56.085,30.25
  Top Layer w0.5: v1(24.5,88) H1.9@26.875,88 26.975,87.9 31.025,87.9 H1.10@31.125,88 H2.9@34.875,88 34.975,87.9 39.025,87.9 H2.10@39.125,88 H3.9@42.875,88 42.975,87.9 47.025,87.9 H3.10@47.125,88 v1(49.5,88)
  Bottom Layer w0.2: R41.2@0.825,43.5 0.825,44.69 1,44.865 v1(1,45) 1,45.135 0.825,45.31 R38.1@0.825,47.5 ; v1(2,32.25) L8.2@2,34.1 ; v1(2.25,72) 2.25,70.825 R35.2@2.325,70.75 ; v1(4,8.75) 4.013,8.763 4.013,10.338 U12.4@4.025,10.35 ; v1(7,19.75) R46.1@7,18.675 C64.1@8.5,18.675 C63.1@10,18.675 ; v1(10.25,69) 10.75,68.5 C40.1@12.575,68.5 ; R33.1@10.425,76 R33.1@10.25,76.175 v1(10.25,77.25) 11.5,78.5 C35.1@13.075,78.5 ; v1(12.5,64.75) C42.1@12.5,65.825 C41.1@14,65.825 14.025,65.825 15.25,67.05 15.25,68.5 15.405,68.655 U9.4@16.45,68.655 ; v1(13.25,39.5) 13.25,40.425 C58.1@13.325,40.5 C54.1@13.325,43.5 C52.1@13.325,45 ; C56.1@13.25,41.825 C56.1@13.325,41.75 ; C49.2@14.675,51 v1(15.75,51) ; v1(14.75,80.25) 16.075,80.25 C33.1@16.1,80.275 C32.1@17.6,80.275 C31.1@19.1,80.275 19.125,80.275 19.85,81 21.45,81 22.075,81.625 C30.1@22.1,81.625 ; C48.1@19.25,51.175 C45.1@25.5,51.175 25.525,51.175 25.75,51.4 25.75,51.425 27.25,52.925 v1(27.25,54.25) ; U11.3@21.5,20.75 v1(21.5,12.43) 24.9,15.83 U11.5@24.9,20.75 ; C61.2@23.5,29.65 C61.2@23.6,29.75 ; v1(24,94) 24.036,94 24.361,94.325 C29.1@26.75,94.325 ; v1(24.5,64) 24.59,63.91 24.89,63.91 25.475,63.325 C43.1@25.5,63.325 ; C29.1@26.775,94.325 27.35,93.75 30.65,93.75 31.225,94.325 C28.1@31.25,94.325 C27.1@34.75,94.325 ; C39.1@27.675,71.45 C38.1@27.675,72.95 C37.1@27.675,74.45 ; C36.1@27.675,77.45 C34.1@27.675,78.95 27.75,79.025 v1(27.75,80) ; v1(29.5,18) C62.1@29.5,19 ; Y4.4@29.73,12.25 29.75,12.23 v1(29.75,10.5) ; v1(30.75,43.75) 31.45,43.05 31.45,42.861 ; 31.45,42.861 31.45,42.75 31.675,42.525 C57.1@31.675,41 C59.1@31.675,39.5 ; v1(32,2.25) 32,3.05 33.175,4.225 C68.2@33.175,4.25 33.175,4.275 32.87,4.58 32.87,5.65 Y4.2@32.27,6.25 32.25,6.27 v1(32.25,8) R52.1@34.075,8 34.3,8.225 34.3,8.55 34.5,8.75 37.3,8.75 37.725,8.325 C66.1@37.75,8.325 ; C65.2@33.175,14.25 33.175,12.825 v1(33.75,12.25) ; v1(37.75,42) C53.1@37.75,43.075 ; v1(38,48.75) 39.79,48.75 cw(c39.79,48.715) U10.20@39.825,48.715 ; 38.85,94.35 39.025,94.35 C26.1@39.25,94.575 C25.1@42.75,94.575 43.425,94.575 44,94 46.65,94 47.225,94.575 C24.1@47.25,94.575 47.325,94.5 v1(49.25,94.5) ; R53.2@44.25,3.925 44.325,4 v1(46.25,4) ; C44.1@44.25,62.175 v1(44.25,63.25) ; v1(46,49) O1.2@46,51 ; v1(50,64.25) 51.515,64.25 U8.4@51.705,64.44 ; R48.2@51.5,17.925 R45.2@51.5,19.575 53.284,19.575 53.709,20 v1(53.75,20) ; R44.1@51.5,27.425 R43.1@51.5,29.075 53.284,29.075 53.709,29.5 v1(53.75,29.5) ; R42.2@51.5,36.925 53.284,36.925 53.709,36.5 v1(53.75,36.5) ; U8.2@51.705,69.52 51.875,69.52 55.156,72.801 55.156,73.306 H6.6@55.5,73.65 ; v1(55.5,45.5) C51.1@55.5,46.575
  Bottom Layer w0.23: C50.1@14.675,48 v1(15.75,48) ; C39.1@27.675,71.45 27.712,71.412 27.712,70.287 v1(27.75,70.25) ; C66.1@37.75,8.325 C67.1@39.25,8.325 ; R50.1@51.5,10.075 53.262,10.075 53.687,10.5 v1(53.75,10.5)
  Bottom Layer w1: v1(5.5,36.75) 7.8,36.75 C60.2@8,36.55 ; D8.2@17,32 17.5,31.5 v1(17.5,30.5) ; C61.2@23.6,29.75 v1(25,29.75)
  other v1: 21.5,9 23,41 23,42 23,43 20,72.75 20,74 20,75.25
LED1: R29.2 U4.21 | length 56.6
  Top Layer w0.2: U4.21@28,38.2 28.972,38.2 29.312,37.86 36.765,37.86 39.64,40.735 39.64,69.633 38.703,70.57 35.07,70.57 v1(34,69.5)
  Bottom Layer w0.2: v1(34,69.5) 33.35,70.15 33.35,76.525 33.75,76.925 33.75,76.95 33.975,77.175 R29.2@34,77.175
LED2: R28.2 U4.22 | length 53.4
  Top Layer w0.2: U4.22@28,38.6 29.025,38.6 29.445,38.18 36.633,38.18 39.32,40.867 39.32,69.5 38.57,70.25 36.75,70.25 v1(36,69.5)
  Bottom Layer w0.2: v1(36,69.5) 35.35,70.15 35.35,76.525 35.75,76.925 35.75,76.95 35.975,77.175 R28.2@36,77.175
LED3: R27.2 U4.23 | length 49.8
  Top Layer w0.2: U4.23@28,39 29.077,39 29.577,38.5 36.5,38.5 39,41 39,69.25 38.75,69.5 v1(38,69.5)
  Bottom Layer w0.2: v1(38,69.5) 37.35,70.15 37.35,76.525 37.75,76.925 37.75,76.95 37.975,77.175 R27.2@38,77.175
LED4: R26.2 U4.25 | length 53.7
  Top Layer w0.2: U4.25@28,39.8 27.99,39.79 27.54,39.79 27.25,39.5 27.25,38.183 27.933,37.5 36.858,37.5 40,40.642 40,69.25 v1(40.25,69.5)
  Bottom Layer w0.2: v1@40.012,69.5 39.362,70.15 39.362,76.525 39.762,76.925 39.762,76.95 39.987,77.175 R26.2@40,77.175 R26.2@40.012,77.175
LED5: R25.2 U4.26 | length 55.7
  Top Layer w0.2: U4.26@28,40.2 27.99,40.19 27.487,40.19 26.93,39.633 26.93,38.051 27.801,37.18 36.99,37.18 40.32,40.51 40.32,68.039 40.75,68.469 v1(40.75,68.5)
  Bottom Layer w0.2: v1(40.75,68.5) 40.846,68.596 40.846,69.096 41.048,69.298 41.048,76.798 41.425,77.175 R25.2@42,77.175
"Left Motor Control 1": H2.6 H3.5 H3.6 U4.16 | length 85.4
  Top Layer w0.2: U4.16@25.2,37 25.21,36.99 25.21,36.54 v1(26,35.75) ; H2.6@39.125,92 H3.5@42.875,92 v1(45,92) H3.6@47.125,92
  Bottom Layer w0.2: v1(26,35.75) 26,37 25.5,37.5 25.5,40.222 25.8,40.522 25.8,43.097 27.74,45.037 27.74,47.275 30.1,49.635 30.1,61.182 31.28,62.362 31.28,86.448 32.25,87.418 32.25,88.237 33.963,89.95 42.05,89.95 44.25,87.75 45.75,87.75 46.5,88.5 46.5,90.5 v1(45,92)
"Left Motor Control 2": H2.8 H3.7 H3.8 U4.17 | length 76.6
  Top Layer w0.2: v1(25.25,40.75) 25.25,39.778 25.6,39.428 U4.17@25.6,37 ; H2.8@39.125,90 H3.7@42.875,90 44.5,90 v1(45,90.5) 45.5,90 H3.8@47.125,90
  Bottom Layer w0.2: v1(25.25,40.75) 25.25,43 27.42,45.17 27.42,47.407 29.78,49.767 29.78,61.315 30.96,62.495 30.96,86.58 31.874,87.494 31.874,88.314 34.06,90.5 v1(45,90.5)
LNA-In: C2.2 L1.2 U1.2 | length 3.6
  Top Layer w0.35: L1.2@22.175,81 C2.2@22.175,79.35 22.2,79.175 U1.2@22.2,77.45
"Motor 1 PWM": H1.3 U4.7 | length 66.3
  Top Layer w0.2: v1(19,41.25) 19.75,41.25 20.598,40.402 20.598,39.402 21.6,38.4 U4.7@21.6,37 ; v1(26.75,93) 26.75,93.875 H1.3@26.875,94
  Bottom Layer w0.2: v1(19,41.25) 19.096,41.346 19.346,41.346 20.25,42.25 20.25,43.78 21.82,45.35 24.79,45.35 25.5,46.06 25.5,48.203 27.86,50.563 27.86,62.11 29.04,63.29 29.04,87.375 29.95,88.285 29.95,89.8 v1(26.75,93)
"Motor 2 PWM": H1.4 U4.6 | length 64.9
  Top Layer w0.2: v1(19,40.25) 20.023,39.227 20.273,39.227 21.2,38.3 U4.6@21.2,37 ; H1.4@31.125,94 31.25,93.875 v1(31.25,93)
  Bottom Layer w0.2: v1(19,40.25) 20.57,41.82 20.57,43.648 21.952,45.03 24.922,45.03 25.82,45.928 25.82,48.07 28.18,50.43 28.18,61.977 29.36,63.157 29.36,87.243 30.27,88.153 30.27,92.02 v1(31.25,93)
"Motor 3 PWM": H2.3 U4.4 | length 66.2
  Top Layer w0.2: v1(19,39.25) 19.498,38.752 19.998,38.752 20.4,38.35 U4.4@20.4,37 ; v1(34.75,93) 34.75,93.875 H2.3@34.875,94
  Bottom Layer w0.2: v1(19,39.25) 20.89,41.14 20.89,43.515 22.085,44.71 25.055,44.71 26.14,45.795 26.14,47.937 28.5,50.297 28.5,61.845 29.68,63.025 29.68,87.11 30.59,88.02 30.59,88.84 v1(34.75,93)
"Motor 4 PWM": H2.4 U4.3 | length 70.2
  Top Layer w0.2: v1(19,38.25) 19.75,38.25 20,38 U4.3@20,37 ; v1(39,93) 39,93.875 H2.4@39.125,94
  Bottom Layer w0.2: v1(19,38.25) 19.096,38.346 19.096,38.568 21.21,40.682 21.21,43.383 22.217,44.39 25.187,44.39 26.46,45.663 26.46,47.805 28.82,50.165 28.82,61.712 30,62.892 30,86.978 30.91,87.888 30.91,88.707 33.953,91.75 37.75,91.75 v1(39,93)
"Motor 5 PWM": H3.3 U4.2 | length 76
  Top Layer w0.2: U4.2@19.6,37 19.6,36.248 19.968,35.88 19.968,35.282 v1(20,35.25) ; v1(42.75,93) 42.75,93.875 H3.3@42.875,94
  Bottom Layer w0.2: v1(20,35.25) 20,39.02 21.53,40.55 21.53,43.25 22.35,44.07 25.32,44.07 26.78,45.53 26.78,47.672 29.14,50.032 29.14,61.58 30.32,62.76 30.32,86.845 31.23,87.755 31.23,88.575 34.085,91.43 41.18,91.43 v1(42.75,93)
"Motor 6 PWM": H3.4 U4.1 | length 81.9
  Top Layer w0.2: U4.1@19.2,37 19.21,36.99 19.21,35.79 v1(19.25,35.75) ; v1(46.75,93) 46.75,93.625 H3.4@47.125,94
  Bottom Layer w0.2: v1(19.25,35.75) 19.25,35 19.75,34.5 20.25,34.5 20.7,34.95 20.7,39.228 21.85,40.378 21.85,43.1 22.5,43.75 25.5,43.75 27.1,45.35 27.1,47.54 29.46,49.9 29.46,61.447 30.64,62.627 30.64,86.713 31.554,87.627 31.554,88.446 34.218,91.11 42.36,91.11 44.25,93 v1(46.75,93)
NetA1_1: A1.1 C1.2 L1.1 | length 18.8
  Top Layer w0.35: A1.1@5,84 22.125,84 cw(c22.125,83.95) C1.2@22.175,83.95 L1.1@22.175,82.35
NetC10_2: C10.2 L3.2 | length 1.5
  Top Layer w0.35: C10.2@20.5,61.675 L3.2@22,61.675
NetC11_2: C11.2 L5.3 U3.10 | length 3.1
  Top Layer w0.35: L5.3@11.577,60 12.825,60 ccw(c12.825,60.25) 13.075,60.25 U3.10@14.5,60.25
NetC15_2: C15.2 U3.16 | length 1.9
  Top Layer w0.2: U3.16@16.75,58.5 16.75,56.9 16.975,56.675 C15.2@17,56.675
NetC16_2: C16.2 U2.19 | length 2.3
  Top Layer w0.2: U2.19@29.795,57.868 29.795,55.88 C16.2@30,55.675
NetC17_2: C17.2 R11.2 Y3.3 | length 2.8
  Top Layer w0.2: Y3.3@35.075,43.051 C17.2@35.075,44.5
  Top Layer w0.23: R11.2@33.675,44.5 C17.2@35.075,44.5
NetC53_2: C53.2 U10.17 | length 2.3
  Bottom Layer w0.2: C53.2@37.75,44.425 37.975,44.65 38.365,44.65 38.62,44.905 U10.17@39.825,44.905
NetD1_1: D1.1 R29.1 | length 3.2
  Top Layer w0.2: v1(34,73.5) D1.1@34,74.4
  Bottom Layer w0.2: v1(34,73.5) R29.1@34,75.825
NetD2_1: D2.1 R28.1 | length 3.2
  Top Layer w0.2: v1(36,73.5) D2.1@36,74.4
  Bottom Layer w0.2: v1(36,73.5) R28.1@36,75.825